# Altium PCB ControllerBoardPCB.PcbDoc
Units mm, origin at the board's own origin, x right, y up, seen from the top; angles counter-clockwise.
Board outline 70 x 90 mm, 2 copper layers (Top Layer, Bottom Layer); 38 components, 55 nets, 246 pads, 0 vias.
Unrouted connection lines stored in the file: 5.
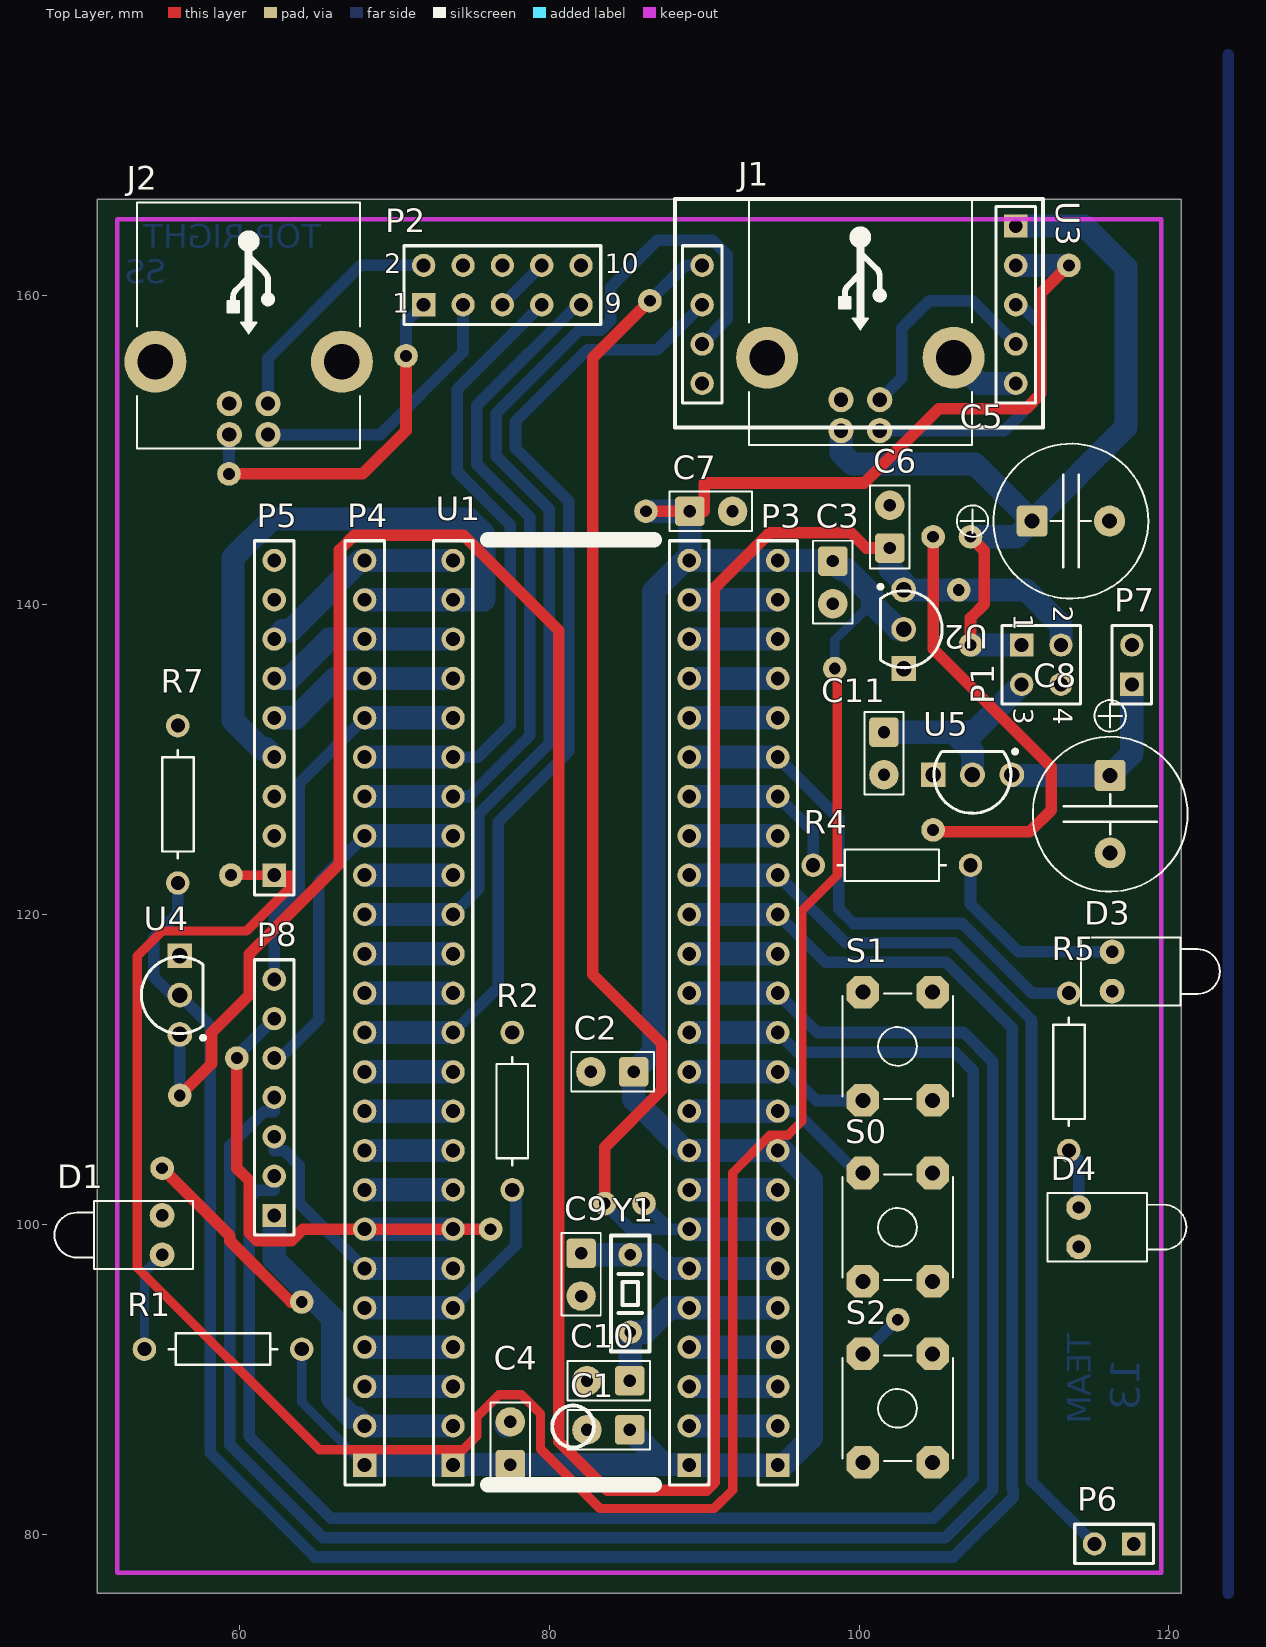
[diagram p0: Top Layer view]
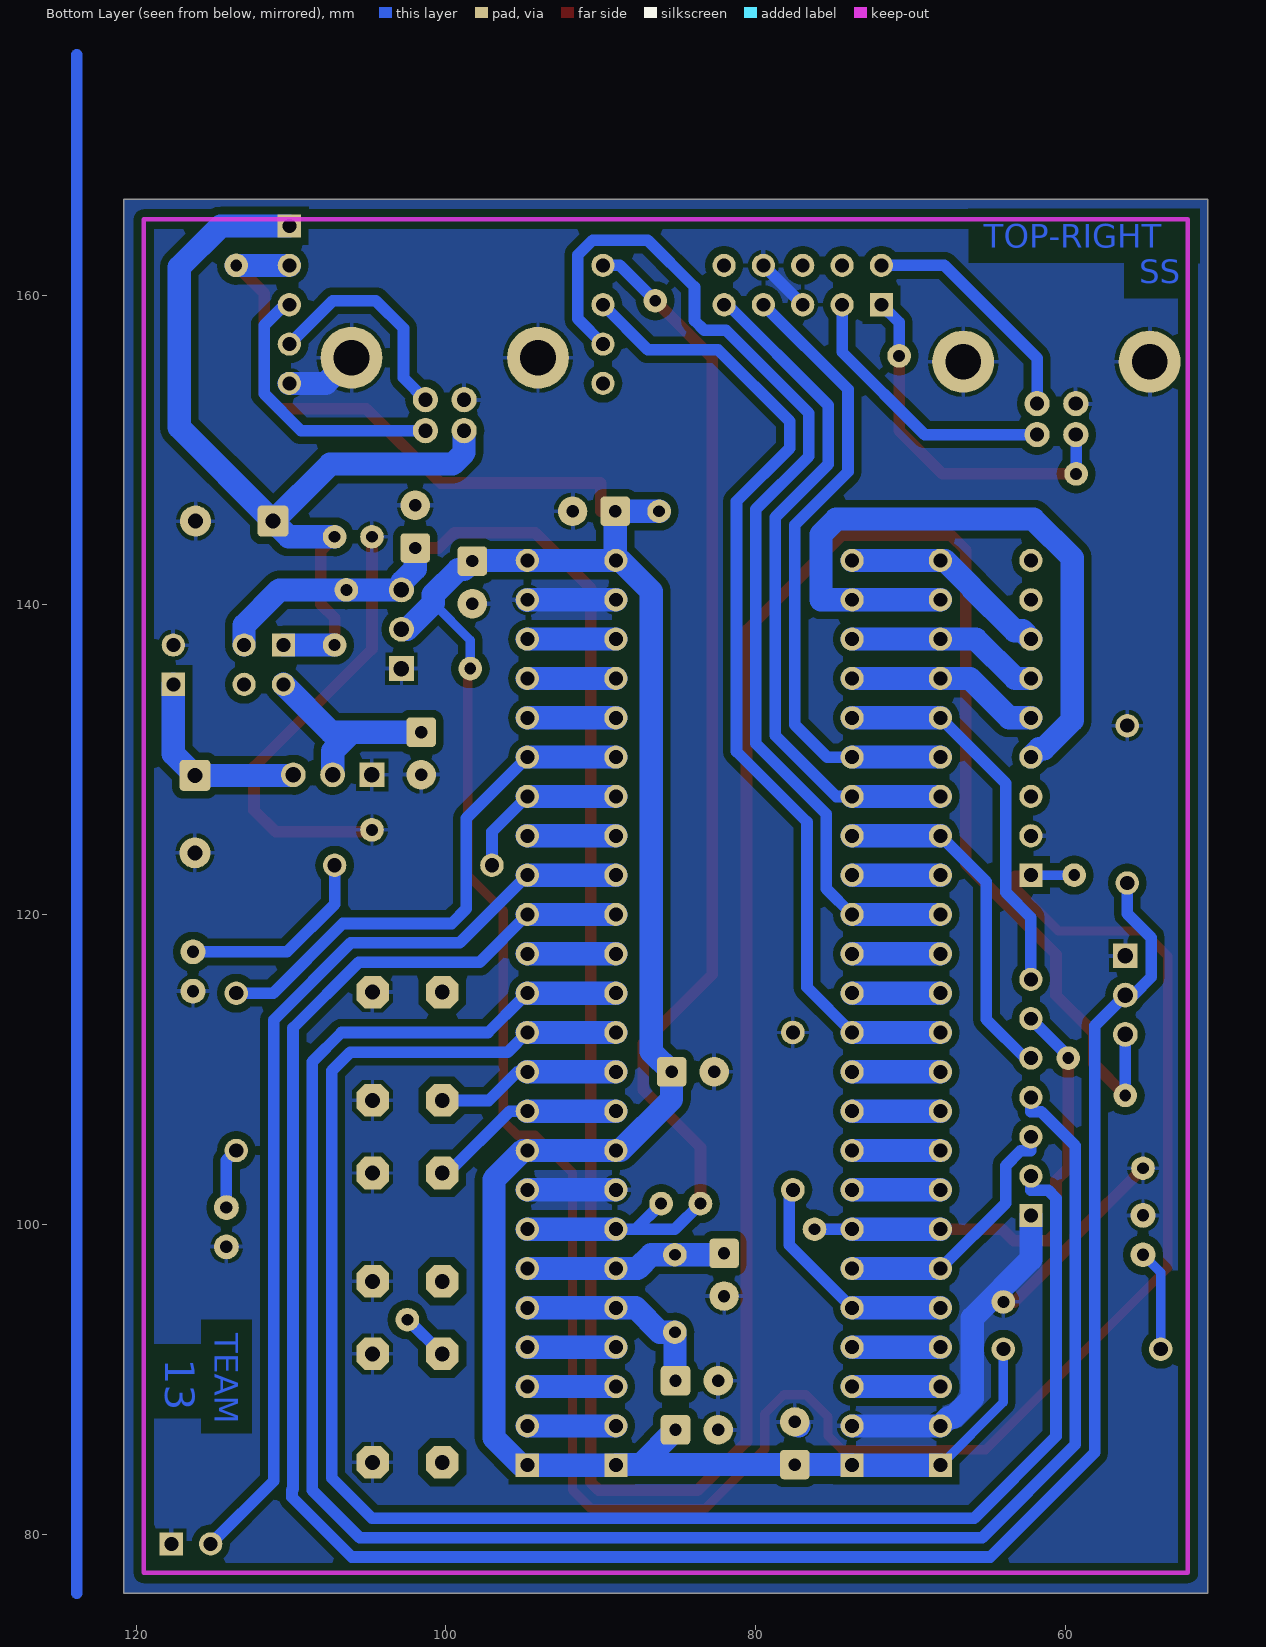
[diagram p1: Bottom Layer view, seen from below]

## Layer stack, top to bottom
Top Solder: solder mask 0.0102, Solder Resist, Dk 3.5
Top Layer: signal copper 0.0356
Dielectric 1: dielectric 0.32, FR-4, Dk 4.8
Bottom Layer: signal copper 0.0356
Bottom Solder: solder mask 0.0102, Solder Resist, Dk 3.5

## Board outline
50.8,76.2 120.8,76.2 120.8,166.2 50.8,166.2

## Design rules (kind name [scope] priority, off if disabled: settings)
Clearance [All] p1: gap=0.5
PermittedLayers [All] p1: toplayerpermitted=FALSE bottomlayerpermitted=TRUE
PolygonConnect [All] p1: connectstyle=Relief reliefconductorwidth=0.254 reliefentries=4 polygonreliefangle="90 Angle" airgapwidth=0.254
RoutingVias [All] p1: holewidth=0.8 width=1.6 viastyle="Through Hole" minholewidth=0.711 minwidth=1.27 maxholewidth=0.711 maxwidth=1.27
SolderMaskExpansion [All] p1: expansion=0.102
Width [All] p1: maxlimit=1.5 minlimit=0.6 preferedwidth=0.6
30 further rules are at their usual default settings.

## Components (designator, comment, footprint, x,y, rotation, side; value= is the part's Value field where it differs from the comment)
C1 "100n" CAPC500P450250X550_2.5mm 83.693,86.741 r180 top
C2 "100n" CAPC500P450250X550_2.5mm 83.947,109.855 r180 top
C3 "100n" CAPC500P450250X550_2.5mm 98.298,141.351 r270 top
C4 "100n" CAPC500P450250X550_2.5mm 77.47,85.979 r90 top
C5 "10uF" CAPE10.0MM_Rad_10x14mm 113.665,145.415 r0 top
C6 "1uF" CAPC500P450250X550_2.5mm 101.981,145.161 r90 top
C7 "1uF" CAPC500P450250X550_2.5mm 90.551,146.05 r0 top
C8 "1uF" CAPE10.0MM_Rad_10x14mm 116.205,126.492 r270 top
C9 "10pF" CAPC500P450250X550_2.5mm 82.042,96.647 r270 top
C10 "10pF" CAPC500P450250X550_2.5mm 83.693,89.916 r180 top
C11 "1uF" CAPC500P450250X550_2.5mm 101.6,130.302 r270 top
D1 "LED1" LED-1 54.991,99.314 r180 top
D3 "LED1" LED-1 116.332,116.332 r0 top
D4 "LED1" LED-1 114.173,99.822 r0 top
J1 "USB-B - UART" USB_TypeB_Tyco 100.076,166.243 r270 top
J2 "USB-B - UART" USB_TypeB_Tyco 60.579,165.989 r270 top
P1 "POWER_HEADER" HDR2X2 110.49,137.414 r270 top
P2 "MCPUSBUART_HEADER" HDR2X5 71.882,159.385 r0 top
P3 "BREAKOUT_HEADER_LEFT" HDR1X24 94.742,84.455 r90 top
P4 "BREAKOUT_HEADER_RIGHT" HDR1X24 68.072,84.455 r90 top
P5 "GYRO_HEADER" HDR1X9 62.23,122.555 r90 top
P6 "LIGHTSENSOR_HEADER" HDR1X2 117.729,79.375 r180 top
P7 "V_EXT_CONNECTOR" HDR1X2 117.602,134.874 r90 top
P8 "POWERBOARD_HEADER" HDR1X7 62.23,100.584 r90 top
R1 "Carbon Film" RESTH_AXIAL-0.4#1 58.928,91.948 r0 top
R2 "Carbon Film" RESTH_AXIAL-0.4#2 77.597,107.315 r270 top
R4 "Carbon Film" RESTH_AXIAL-0.4#1 102.108,123.19 r0 top
R5 "Carbon Film" RESTH_AXIAL-0.4#1 113.538,109.855 r270 top
R7 "Carbon Film" RESTH_AXIAL-0.4#1 56.007,127.127 r90 top
S0 "SW_THT_PB_7.0mm" TACT-SWITCH-TS1170 102.489,99.822 r90 top
S1 "SW_THT_PB_7.0mm" TACT-SWITCH-TS1170 102.489,111.506 r90 top
S2 "SW_THT_PB_7.0mm" TACT-SWITCH-TS1170 102.489,88.138 r90 top
U1 "STM32F051C6 Breakout Board" STM32F051C6BreakoutBoard 89.027,84.455 r90 top
U2 "3V3LinReg" TO-92Wide 102.87,138.43 r270 top
U3 "STM32F0DebuggerHdr" STM32F051C6_DbgrHdr 110.109,164.465 r0 top
U4 "LM35WidePin" TO-92Wide 56.134,114.808 r90 top
U5 "5VLinReg" TO-92Wide 107.315,129.032 r180 top
Y1 "8MHz" 8MHZOSC 85.217,98.044 r270 top

## Footprints (in the part's own frame and the unit in brackets; to place one, negate y for a bottom-side part, rotate by r counter-clockwise, add the part's x,y. Pads: shape width x height; smd on the part's side, far side on the other; paste and mask are expansions set on the pad)
8MHZOSC [mil]
  round 60 hole 30: 1(196.85,0) 2(0,0)
  silkscreen extent -49,-49 246,49
CAPC500P450250X550_2.5mm [mil] "TDK FK24 radial ceramic capacitor"
  round 20 on Mech15: 0(40,0)
  rrect25% 75x75 hole 31.5: 1(-58.43,0)
  round 75 hole 31.5: 2(50,0)
  silkscreen extent -110,-50 100,50
CAPE10.0MM_Rad_10x14mm [mm] "10mm Pitch Radial Capacitor 10x14mm DxH"
  round 0.5 on Mech15: 0(0,0)
  rrect25% 2x2 hole 0.965: 1(-2.5,0)
  round 2 hole 0.965: 2(2.5,0)
  silkscreen extent -7.36,-5 5,5, body extent -5.25,-5.24 5.21,5.24, height 13.99
HDR1X2 [mm] "Connector; Header; 2 Position"
  rect 1.5x1.5 hole 0.9: 1(0,0)
  round 1.5 hole 0.9: 2(2.54,0)
  silkscreen extent -1.27,-1.27 3.81,1.27
HDR1X7 [mm] "Connector; Header; 7 Position"
  rect 1.5x1.5 hole 0.9: 1(0,0)
  round 1.5 hole 0.9: 2(2.54,0) 3(5.08,0) 4(7.62,0) 5(10.16,0) 6(12.7,0) 7(15.24,0)
  silkscreen extent -1.27,-1.27 16.51,1.27
HDR1X9 [mm] "Connector; Header; 9 Position"
  rect 1.5x1.5 hole 0.9: 1(0,0)
  round 1.5 hole 0.9: 2(2.54,0) 3(5.08,0) 4(7.62,0) 5(10.16,0) 6(12.7,0) 7(15.24,0) 8(17.78,0) 9(20.32,0)
  silkscreen extent -1.27,-1.27 21.59,1.27
HDR1X24 [mm] "Connector; Header; 24 Position"
  rect 1.5x1.5 hole 0.9: 1(0,0)
  round 1.5 hole 0.9: 2(2.54,0) 3(5.08,0) 4(7.62,0) 5(10.16,0) 6(12.7,0) 7(15.24,0) 8(17.78,0) 9(20.32,0) 10(22.86,0) 11(25.4,0) 12(27.94,0) 13(30.48,0) 14(33.02,0) 15(35.56,0) 16(38.1,0) 17(40.64,0) 18(43.18,0) 19(45.72,0) 20(48.26,0) 21(50.8,0) 22(53.34,0) 23(55.88,0) 24(58.42,0)
  silkscreen extent -1.27,-1.27 59.69,1.27
HDR2X2 [mm] "Connector; Header; 2x2 Position"
  rect 1.5x1.5 hole 0.9: 1(0,0)
  round 1.5 hole 0.9: 2(0,2.54) 3(2.54,0) 4(2.54,2.54)
  silkscreen extent -1.27,-1.27 3.81,3.81
HDR2X5 [mm] "Connector; Header; 5x2 Position"
  rect 1.5x1.5 hole 0.9: 1(0,0)
  round 1.5 hole 0.9: 2(0,2.54) 3(2.54,0) 4(2.54,2.54) 5(5.08,0) 6(5.08,2.54) 7(7.62,0) 8(7.62,2.54) 9(10.16,0) 10(10.16,2.54)
  silkscreen extent -1.27,-1.27 11.43,3.81
LED-1 [mm] "LED; 2 Leads"
  round 1.6 hole 0.8: 1(0,1.27) 2(0,-1.27)
  silkscreen extent -2,-2.2 6.95,2.2
RESTH_AXIAL-0.4#1 [mil]
  round 59.61 hole 36 unplated: 1(-200,0) 2(200,0)
  silkscreen extent -138,-40 138,40, body extent -212,-50 212,50, height 102
RESTH_AXIAL-0.4#2 [mil]
  round 60 hole 36 unplated: 1(-200,0) 2(200,0)
  silkscreen extent -138,-40 138,40, body extent -212,-50 212,50, height 102
STM32F051C6_DbgrHdr [mm]
  rect 1.5x1.5 hole 0.9: 1(0,0)
  round 1.5 hole 0.9: 2(0,-2.54) 3(0,-5.08) 4(0,-7.62) 5(0,-10.16) 6(-20.25,-2.54) 7(-20.25,-5.08) 8(-20.25,-7.62) 9(-20.25,-10.16)
  silkscreen extent -22,-13 1.75,1.75
STM32F051C6BreakoutBoard [mm]
  rect 1.5x1.5 hole 0.9: 1(0,0) 48(0,15.25)
  round 1.5 hole 0.9: 2(2.54,0) 3(5.08,0) 4(7.62,0) 5(10.16,0) 6(12.7,0) 7(15.24,0) 8(17.78,0) 9(20.32,0) 10(22.86,0) 11(25.4,0) 12(27.94,0) 13(30.48,0) 14(33.02,0) 15(35.56,0) 16(38.1,0) 17(40.64,0) 18(43.18,0) 19(45.72,0) 20(48.26,0) 21(50.8,0) 22(53.34,0) 23(55.88,0) 24(58.42,0) 25(58.42,15.25) 26(55.88,15.25) 27(53.34,15.25) 28(50.8,15.25) 29(48.26,15.25) 30(45.72,15.25) 31(43.18,15.25) 32(40.64,15.25) 33(38.1,15.25) 34(35.56,15.25) 35(33.02,15.25) 36(30.48,15.25) 37(27.94,15.25) 38(25.4,15.25) 39(22.86,15.25) 40(20.32,15.25) 41(17.78,15.25) 42(15.24,15.25) 43(12.7,15.25) 44(10.16,15.25) 45(7.62,15.25) 46(5.08,15.25) 47(2.54,15.25)
  silkscreen extent -1.27,-1.27 59.75,16.52
TACT-SWITCH-TS1170 [mm] "Bondtact sealed TH tact switch"
  round 0.508 on Mech15: 0(0,0)
  oct 2.1x2.1 hole 0.965: 1(-3.5,-2.25) 1(3.5,-2.25) 2(-3.5,2.25) 2(3.5,2.25)
  silkscreen extent -3.4,-3.56 3.4,3.56, body extent -4.13,-3.25 4.13,3.25, height 7
TO-92Wide [mm]
  round 1.6 hole 1: 1(-2.54,0) 2(0,0)
  rect 1.6x1.6 hole 1: 3(2.54,0)
  silkscreen extent -2.87,-1.62 2.48,2.48, body extent -2.5,-1.5 2.5,2.5, height 6.86
USB_TypeB_Tyco [mm]
  round 1.626 hole 0.914: 1(14.99,-1.25) 2(14.99,1.25) 3(12.99,1.25) 4(12.99,-1.25)
  round 4 hole 2.3: MH(10.28,6.02) MH(10.28,-6.02)
  silkscreen extent 0,-7.2 15.9,7.2, body extent 0,-7.19 15.7,7.19, height 11.5

## Part data
C1 C2 C3 C4 C6 C7 C9 C10 C11: library part CAPR_220n_Radial_5mm, "Capacitor Ceramic 220nF 10% 50V X7R radial 5mm lead spacing"
C5 C8: library part CAPE_470u_16V_THT, "Capacitor THT Alum Elec 470uF 20% 16V"
D1 D3 D4: "Typical RED GaAs LED"
J1 J2: library part USB_TypeB, "Connector THT Type B USB connector"
P1: library part "Header 2X2", "Header, 2-Pin, Dual row"
P2: library part "Header 5X2", "Header, 5-Pin, Dual row"
P3 P4: library part "Header 24", "Header, 24-Pin"
P5: library part "Header 9", "Header, 9-Pin"
P6 P7: library part "Header 2", "Header, 2-Pin"
P8: library part "Header 7", "Header, 7-Pin"
R1 R2 R4 R5 R7: library part RES_1K_Axial_0.25W_5%, "Resistor THD Axial 1k Ohm 0.25W 5% Carbon Film"
S0 S1 S2: "Switch, tact, 7.0mm stem"
U1: library part STM32F051C6Brk
U2 U5: library part VREG5V, "MCP"
U4: library part LM35Big
Y1: library part XTAL, "Crystal Oscillator"

## Free pads (board coordinates)
  round 1.524 hole 0.762: 0(70.739,156.083) 0(86.487,159.639) 1(59.309,148.463) 1(83.566,101.346) 2(59.817,110.744) 2(104.775,144.399) 3(76.2,99.695) 3(104.775,125.476) 4(107.188,144.399) 5(107.188,137.414) 6(86.233,146.05) 7(113.538,161.925) 9(106.426,140.97) 10(56.134,108.331) 11(54.991,103.632) 12(64.008,94.996) 13(98.425,135.89) 14(59.436,122.555) 15(86.106,101.346) 16(102.489,93.853)

## Nets (pads, with @x,y where several pads share a name; then routed paths per layer and width w, separated by ;. In a path a pad name is that pad's centre, name@x,y a point inside that pad or via, vN(x,y) a via of type N, cw(c..) or ccw(c..) an arc to the next point about the centre after c; other vN are vias at no path point)
3V3: C1.1 C2.1 C3.1 C4.1 C7.1 P3.1 P3.9 P3.24 P4.1 P5.1 pad.6 pad.7 pad.13 pad.14 R1.2 U1.1 U1.9 U1.24 U1.48 U2.2 U3.2 | length 322.9
  Top Layer w0.6: pad.14 P5.1 63.28,122.555 63.28,121.786 60.442,118.948 55.003,118.948 53.391,117.336 53.391,97.212 65.158,85.445 74.419,85.445 75.327,86.353 75.327,87.584 76.744,89.001 78.196,89.001 79.421,87.777 79.421,85.497 83.263,81.655 90.626,81.655 91.827,82.856 91.827,103.345 94.247,105.765 95.384,105.765 96.292,106.673 96.292,120.252 98.585,122.545 98.585,135.89 pad.13
  Top Layer w0.75: pad.6 C7.1 89.994,146.05 89.994,147.877 100.337,147.877 105.14,152.68 110.782,152.68 111.734,153.632 111.734,160.121 pad.7
  Bottom Layer w0.6: pad.14 P5.1 ; R1.2 64.008,88.519 P4.1 ; pad.13 98.425,137.726 100.82,140.121
  Bottom Layer w1.5: P4.1 U1.48 ; U1.48@73.817,84.495 C4.1 87.423,84.495 ; C1.1 87.423,84.495 ; pad.6 C7.1 U1.24@89.067,142.915 ; U1.1@88.987,84.455 U1.1 P3.1 ; U1.1@88.987,84.495 87.423,84.495 ; P3.1@95.123,84.455 96.901,86.233 96.901,102.904 95.03,104.775 P3.9 U1.9 88.739,104.775 85.431,108.083 C2.1 86.741,111.165 86.741,140.877 88.739,142.875 U1.24 P3.24 C3.1@98.258,142.875 ; C3.1@98.726,142.407 98.85,142.284 99.21,142.284 100.82,140.674 100.82,140.121 U2.2@102.511,138.43 ; U3.2 pad.7
5V: C6.1 P1.2 P1.4 pad.9 pad.10 U2.1 U4.1 | length 210.9
  Top Layer w0.75: pad.10 58.18,110.377 58.18,112.381 60.605,114.806 60.605,117.449 66.447,123.291 66.447,143.548 67.399,144.5 74.45,144.5 80.596,138.355 80.596,85.984 83.75,82.83 90.139,82.83 90.652,83.343 90.652,141.083 94.231,144.662 99.473,144.662 100.459,143.677 C6.1
  Bottom Layer w0.75: pad.10 U4.1
  Bottom Layer w1.5: C6.1 101.981,142.341 102.82,141.502 102.82,141.02 U2.1 110.744,140.97 113.03,138.684 P1.2
5VUSB: C5.1 J1.1 P1.1 pad.4 pad.5 U3.1 | length 58.1
  Top Layer w0.75: pad.5 107.188,139.16 108.077,140.049 108.077,143.51 pad.4
  Bottom Layer w1.5: J1.1 98.826,149.84 99.568,149.098 107.482,149.098 C5.1 ; pad.5 P1.1 ; pad.4 110.149,144.399 C5.1 ; U3.1 114.554,164.465 117.221,161.798 117.221,151.471 C5.1
BOOT0: P4.5 R2.2 U1.44 | length 15
  Bottom Layer w0.75: U1.44 77.837,98.675 R2.2@77.837,102.235
  Bottom Layer w1.5: P4.5 U1.44
DAC1: P3.14 U1.14 | length 5.7
  Bottom Layer w1.5: U1.14 P3.14
DEBUGUSB_DM: J1.2 U3.3 | length 17.7
  Bottom Layer w0.75: J1.2 109.355,151.253 111.734,153.632 111.734,158.058 U3.3@110.407,159.385
DEBUGUSB_DP: J1.3 U3.4 | length 14.5
  Bottom Layer w0.75: J1.3 102.743,154.67 102.743,157.861 104.521,159.639 107.315,159.639 U3.4
GND: C1.2 C2.2 C3.2 C4.2 C5.2 C6.2 C7.2 C8.2 C9.2 C10.2 C11.2 D1.2 D3.2 D4.2 J1.4 J1.MH J2.4 J2.MH P2.5 P2.8 P3.8 P3.23 P4.2 P5.2 P6.1 P7.2 P8.1 pad.2@104.775,144.399 pad.3@104.775,125.476 pad.11 pad.12 R2.1 R7.2 S0.1 S1.1 S2.1 U1.8 U1.23 U1.47 U2.3 U3.5 U4.3 U5.3 | length 83
  Top Layer w0.75: pad.11 59.355,99.268 59.355,98.954 pad.12@63.313,94.996 ; pad.2@104.775,144.399 104.775,137.16 112.395,129.54 112.395,126.746 110.998,125.349 pad.3@104.902,125.349
  Bottom Layer w0.75: P2.5 P2.8
  Bottom Layer w1.5: P8.1 62.23,97.74 66.015,93.955 66.015,88.764 67.244,87.535 67.532,87.535 P4.2 U1.47 ; C4.2@77.216,86.995 C4.2 ; U1.8 P3.8 ; U1.23 P3.23 P3.23@94.742,140.284 ; J1.MH@106.096,155.963 107.754,154.305 U3.5
LEFT_EN: P4.7 P8.6 pad.2@59.817,110.744 pad.3@76.2,99.695 U1.42 | length 39.4
  Top Layer w0.75: pad.2@59.817,110.744 59.817,103.632 60.605,102.844 60.605,99.472 61.118,98.959 63.342,98.959 64.078,99.695 P4.7 U1.42 pad.3@76.2,99.695
  Bottom Layer w0.75: pad.2@59.817,110.744 59.817,110.871 P8.6 ; U1.42 pad.3@76.2,99.695
  Bottom Layer w1.5: P4.7 U1.42
MOTORSIG_LF: P4.17 P8.5 U1.32 | length 22.7
  Bottom Layer w0.75: P8.5 62.611,110.744 65.105,113.238 65.105,122.128 P4.17
  Bottom Layer w1.5: P4.17 U1.32
MOTORSIG_LR: P3.13 P8.4 U1.13 | length 125.6
  Bottom Layer w0.75: P8.4 62.23,107.289 61.557,107.289 59.355,105.087 59.355,85.796 65.376,79.775 105.556,79.775 108.625,82.844 108.625,110.514 106.743,112.395 97.282,112.395 P3.13@95.128,114.549
  Bottom Layer w1.5: U1.13 P3.13
MOTORSIG_RF: P4.20 P8.7 U1.29 | length 25
  Bottom Layer w0.75: P8.7 62.23,119.818 63.855,121.443 63.855,128.498 P4.20
  Bottom Layer w1.5: P4.20 U1.29
MOTORSIG_RR: P3.12 P8.2 U1.12 | length 113.8
  Bottom Layer w0.75: P8.2 62.23,102.209 61.118,102.209 60.605,101.696 60.605,86.314 65.894,81.025 104.774,81.025 107.375,83.626 107.375,109.932 106.182,111.125 96.012,111.125 P3.12
  Bottom Layer w1.5: U1.12 P3.12
NetC11_1: C11.1 P1.3 U5.2 | length 13.4
  Bottom Layer w1.5: C11.1 106.085,131.786 ; U5.2 107.315,130.556 106.085,131.786 ; P1.3 107.402,131.786 106.085,131.786
NetD1_1: D1.1 R1.1 | length 6.6
  Bottom Layer w0.6: R1.1 53.848,96.901 D1.1
NetD3_1: D3.1 R4.2 | length 12.9
  Bottom Layer w0.75: R4.2 107.188,120.673 110.259,117.602 D3.1
NetD4_1: D4.1 R5.2 | length 3.9
  Bottom Layer w0.75: R5.2 114.173,104.14 D4.1
NetJ2_1: J2.1 P2.1 pad.0@70.739,156.083 pad.1@59.309,148.463 | length 23.7
  Top Layer w0.75: pad.1@59.309,148.463 67.945,148.463 70.739,151.257 pad.0@70.739,156.083
  Bottom Layer w0.75: pad.1@59.309,148.463 59.309,150.979 J2.1 ; pad.0@70.739,156.083 70.739,158.242 P2.1
NetJ2_2: J2.2 P2.3 | length 17.9
  Bottom Layer w0.75: J2.2 69.084,150.999 74.422,156.337 P2.3
NetJ2_3: J2.3 P2.2 | length 15.5
  Bottom Layer w0.75: J2.3 61.829,155.936 67.818,161.925 P2.2
NRST: P3.7 pad.0@86.487,159.639 pad.1@83.566,101.346 pad.15 pad.16 S2.2 U1.7 U3.6 | length 85.2
  Top Layer w0.75: pad.1@83.566,101.346 83.566,104.987 87.258,108.68 87.258,111.682 82.804,116.137 82.804,155.956 pad.0@86.487,159.639
  Bottom Layer w0.75: pad.1@83.566,101.346 85.217,99.695 87.757,99.695 ; pad.15 87.757,99.695 ; pad.0@86.487,159.639 88.773,161.925 U3.6 ; U1.7 87.757,99.695 ; S2.2@99.878,91.638 100.239,91.638 102.454,93.853 pad.16
  Bottom Layer w1.5: U1.7 P3.7
OSC_IN: C10.1 P3.5 U1.5 Y1.1 | length 13.3
  Bottom Layer w1.5: C10.1@85.217,89.956 Y1.1 86.186,93.044 87.757,94.615 U1.5 P3.5
OSC_OUT: C9.1 P3.6 U1.6 Y1.2 | length 13.1
  Bottom Layer w1.5: C9.1 82.129,98.044 Y1.2 86.741,98.044 87.63,97.155 U1.6 P3.6
PA0: P3.10 S0.2 U1.10 | length 12.9
  Bottom Layer w0.75: P3.10 95.885,107.315 99.878,103.322 S0.2@100.239,103.322
  Bottom Layer w1.5: U1.10 P3.10
PA1: P3.11 S1.2 U1.11 | length 12
  Bottom Layer w0.75: P3.11 95.377,109.855 97.226,108.006 S1.2@100.239,108.006
  Bottom Layer w1.5: U1.11 P3.11
PA5: P3.15 R7.1 U1.15 U4.2 | length 149.1
  Bottom Layer w0.75: U4.2@55.626,114.808 54.459,115.975 54.459,118.51 56.007,120.058 R7.1 ; U4.2 58.105,112.837 58.105,85.278 64.858,78.525 106.074,78.525 109.942,82.393 109.942,82.854 109.875,82.921 109.875,112.682 105.626,116.931 97.826,116.931 P3.15
  Bottom Layer w1.5: U1.15 P3.15
PA6: P3.16 P6.2 U1.16 | length 61.5
  Bottom Layer w0.75: P3.16 99.116,118.181 106.144,118.181 111.125,113.2 111.125,83.439 P6.2
  Bottom Layer w1.5: U1.16 P3.16
PA7: P3.17 U1.17 | length 5.7
  Bottom Layer w1.5: U1.17 P3.17
PA9: P2.7 P4.19 U1.30 | length 41.1
  Bottom Layer w0.75: U1.30 75.368,130.175 77.47,132.277 77.47,145.161 74.041,148.59 74.041,153.924 P2.7
  Bottom Layer w1.5: P4.19 U1.30
PA10: P2.9 P4.18 U1.31 | length 44.8
  Bottom Layer w0.75: U1.31 74.803,127.635 78.74,131.572 78.74,145.659 75.311,149.088 75.311,152.896 82.042,159.627 P2.9
  Bottom Layer w1.5: P4.18 U1.31
PA12: P4.16 U1.33 | length 5.7
  Bottom Layer w1.5: P4.16 U1.33
PA15: P4.11 U1.38 | length 5.7
  Bottom Layer w1.5: P4.11 U1.38
PB0: P3.18 R4.1 U1.18 | length 11.1
  Bottom Layer w0.75: P3.18 97.028,125.349 R4.1
  Bottom Layer w1.5: U1.18 P3.18
PB1: P3.19 R5.1 U1.19 | length 34.3
  Bottom Layer w0.75: P3.19 98.679,126.238 98.679,120.386 99.634,119.431 106.662,119.431 111.158,114.935 R5.1
  Bottom Layer w1.5: U1.19 P3.19
PB2: P3.20 U1.20 | length 5.7
  Bottom Layer w1.5: U1.20 P3.20
PB3: P4.10 U1.39 | length 5.7
  Bottom Layer w1.5: P4.10 U1.39
PB4: P4.9 U1.40 | length 5.7
  Bottom Layer w1.5: P4.9 U1.40
PB5: P4.8 U1.41 | length 5.7
  Bottom Layer w1.5: P4.8 U1.41
PB7: P4.6 P8.3 U1.43 | length 17
  Bottom Layer w0.75: P8.3 62.23,104.749 62.903,104.749 63.855,103.797 63.855,101.372 P4.6
  Bottom Layer w1.5: P4.6 U1.43
PB8: P4.4 U1.45 | length 5.7
  Bottom Layer w1.5: P4.4 U1.45
PB9: P4.3 U1.46 | length 5.7
  Bottom Layer w1.5: P4.3 U1.46
PB10: P3.21 U1.21 | length 5.7
  Bottom Layer w1.5: U1.21 P3.21
PB11: P3.22 U1.22 | length 5.7
  Bottom Layer w1.5: U1.22 P3.22
PB12: P4.24 P5.7 U1.25 | length 13.7
  Bottom Layer w1.5: P5.7 62.77,138.335 63.278,138.335 66.072,141.129 66.072,141.163 67.784,142.875 P4.24 U1.25
PB13: P4.23 P5.4 U1.26 | length 43.7
  Bottom Layer w1.5: P5.4 61.69,130.715 61.402,130.715 59.563,132.554 59.563,143.036 62.069,145.542 74.791,145.542 75.777,144.556 75.777,140.335 U1.26 P4.23
PB14: P4.22 P5.6 U1.27 | length 12.6
  Bottom Layer w1.5: P5.6 63.246,135.255 65.786,137.795 P4.22 U1.27
PB15: P4.21 P5.5 U1.28 | length 12.6
  Bottom Layer w1.5: P5.5 63.627,132.715 66.167,135.255 P4.21 U1.28
PC13: P3.2 U1.2 | length 5.7
  Bottom Layer w1.5: U1.2 P3.2
PC14: P3.3 U1.3 | length 5.7
  Bottom Layer w1.5: U1.3 P3.3
PC15: P3.4 U1.4 | length 5.7
  Bottom Layer w1.5: U1.4 P3.4
PF6: P4.14 U1.35 | length 5.7
  Bottom Layer w1.5: P4.14 U1.35
PF7: P4.13 U1.36 | length 5.7
  Bottom Layer w1.5: P4.13 U1.36
T_SWCLK: P4.12 U1.37 U3.7 | length 64.8
  Bottom Layer w0.75: U1.37 76.688,115.306 76.688,125.984 81.24,130.536 81.24,146.694 77.811,150.123 77.811,151.86 82.434,156.483 86.957,156.483 U3.7
  Bottom Layer w1.5: P4.12 U1.37
T_SWDIO: P4.15 U1.34 U3.8 | length 69.7
  Bottom Layer w0.75: U1.34 75.438,121.676 75.438,126.502 79.99,131.054 79.99,146.177 76.561,149.606 76.561,152.378 81.916,157.733 83.312,157.733 83.947,158.368 83.947,160.528 86.969,163.55 90.532,163.55 91.484,162.598 91.484,158.47 U3.8
  Bottom Layer w1.5: P4.15 U1.34
V_BAT: C8.1 P7.1 U5.1 | length 12.8
  Bottom Layer w1.5: U5.1 109.895,128.992 C8.1 117.602,130.389 P7.1
pads on no net: C1.0 C2.0 C3.0 C4.0 C5.0 C6.0 C7.0 C8.0 C9.0 C10.0 C11.0 P2.4 P2.6 P2.10 P5.3 P5.8 P5.9 S0.0 S1.0 S2.0 U3.9
copper on no net: | length 99.3
  Bottom Layer w0.75: 123.825,76.2 123.825,175.514

## Polygon pours and split planes (outlines as drawn)
GND on Bottom Layer "Bottom Layer-GND" (solid, pour order 2): 50.8,166.2 50.8,76.2 120.8,76.2 120.8,166.2

## Keep-outs
Keep-Out Layer:
  lines w0.3: 52.1,77.5 52.1,164.9 119.5,164.9 119.5,77.5 52.1,77.5

## Other copper
Bottom Layer:
  text "TOP-RIGHT" at 65.278,163.068 h1.52
  text "SS" at 55.245,160.782 h1.52
  text "TEAM" at 114.935,92.964 h1.52 r90
  text "13" at 118.11,91.313 h1.9 r90

## Silkscreen, mask and mechanical layers (free items; w line width, h text height)
Drill Drawing:
  text ".LEGEND" at 125.88,81.28 h1.52
  text "Drill Drawing." at 125.88,78.74 h1.52

## Dimensions
52.1,77.5 to 52.1,164.9 on Mechanical 1
52.1,77.5 to 119.5,77.5 on Mechanical 1

## Text inside footprints (layer, text, board x,y; h text height)
P1: Top Overlay "1" at 109.982,139.446 h1.27 r270; Top Overlay "2" at 112.522,139.954 h1.27 r270; Top Overlay "4" at 112.522,133.35 h1.27 r270; Top Overlay "3" at 109.982,133.35 h1.27 r270
P2: Top Overlay "10" at 83.566,161.417 h1.27; Top Overlay "9" at 83.566,158.877 h1.27; Top Overlay "1" at 69.85,158.877 h1.27; Top Overlay "2" at 69.342,161.417 h1.27